# EAGLE board Unicorn_Garbage_Holder_Controller (EAGLE 9.5.0)
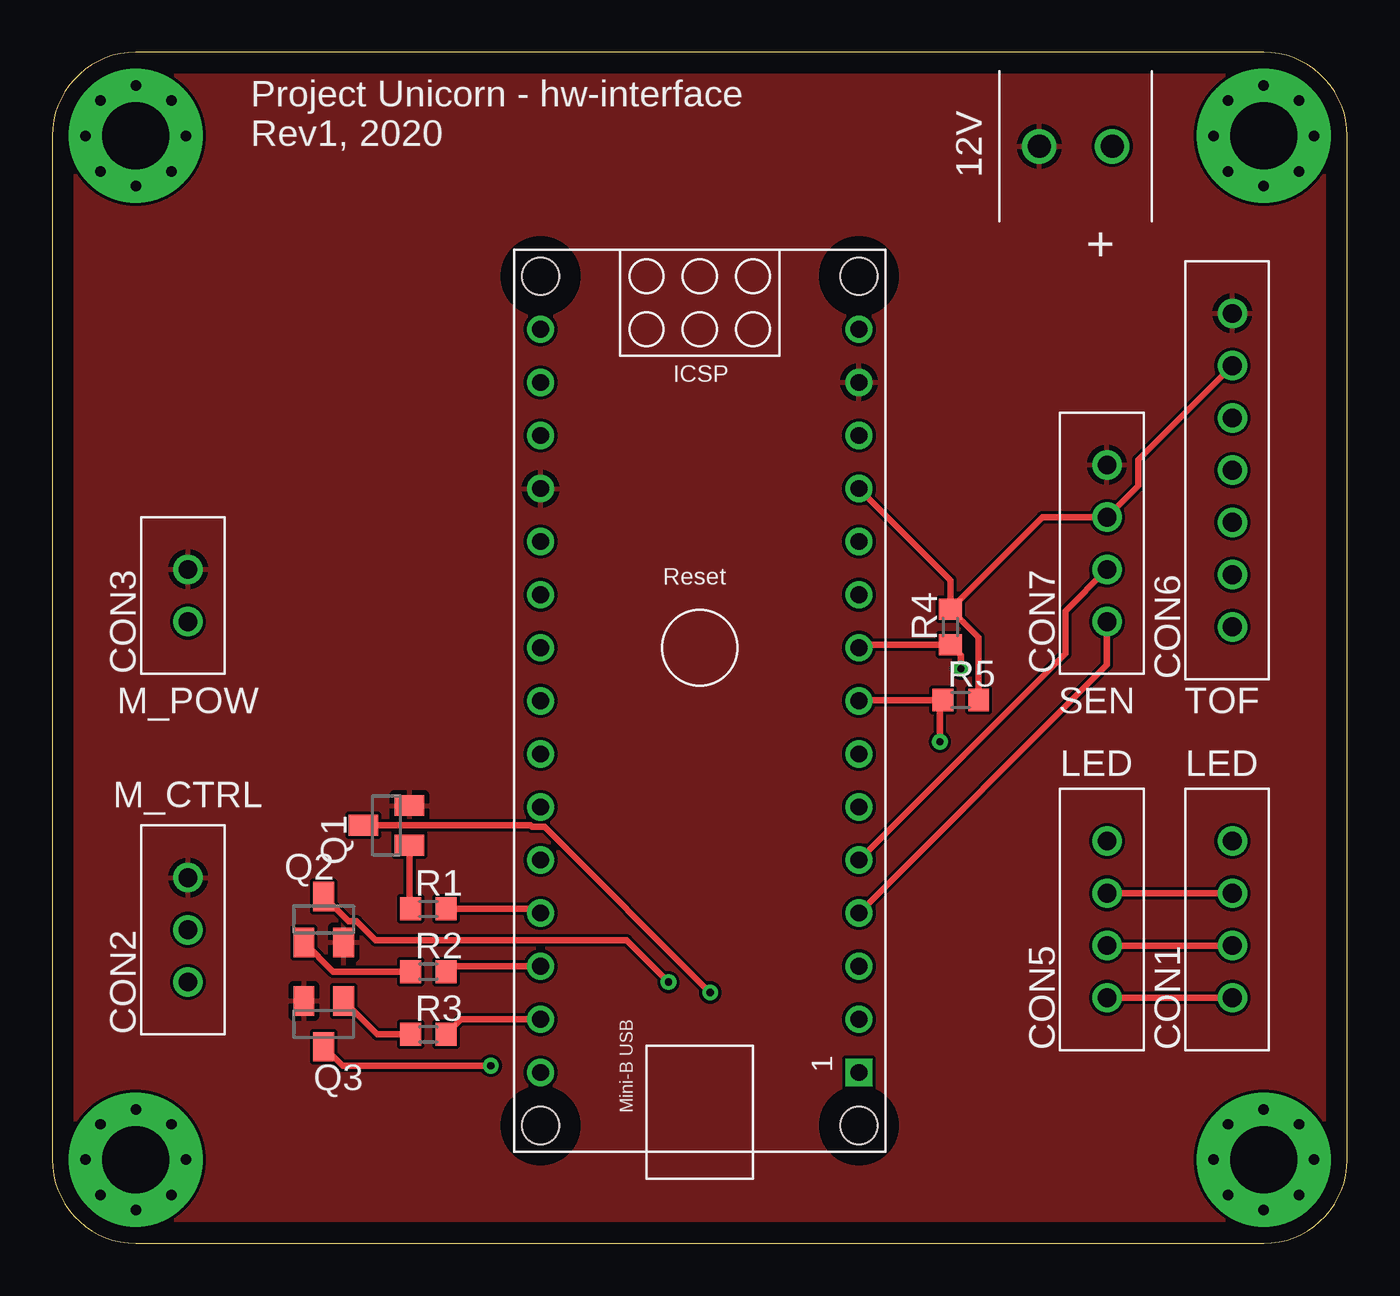
[diagram p0: board, top side]
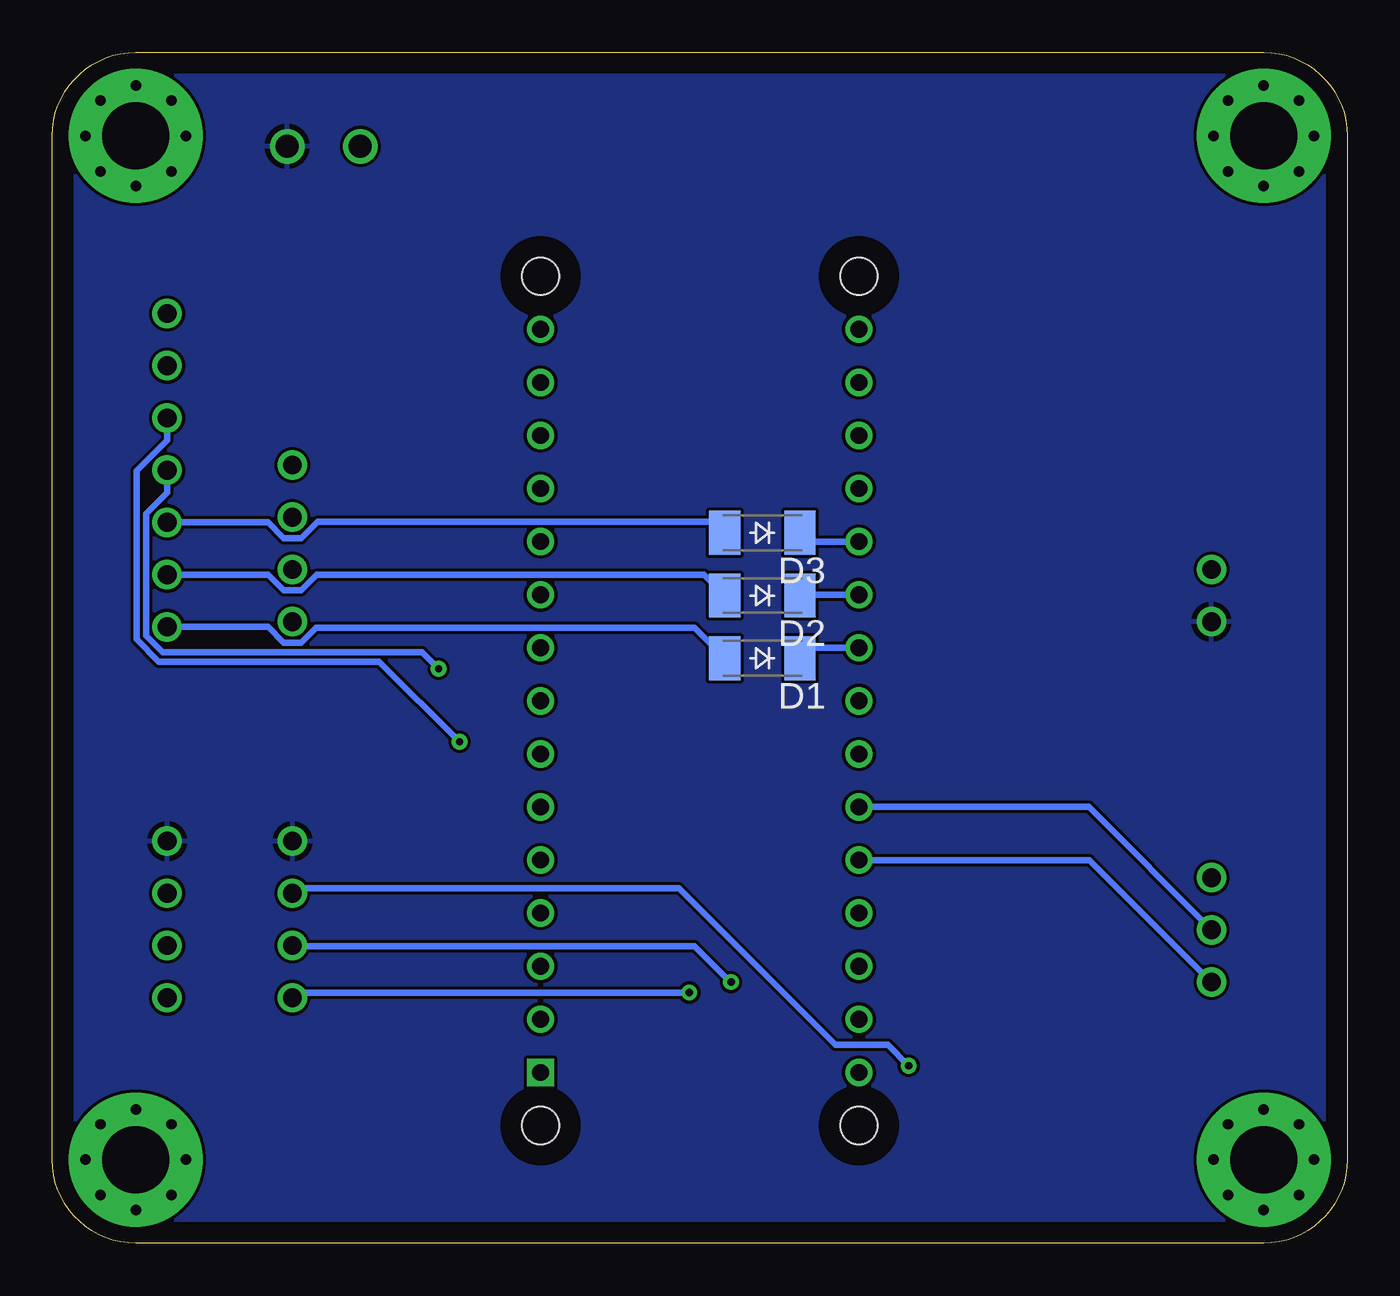
[diagram p1: board, bottom side, seen from below]

Size 62 x 57 mm. Coordinates in mm from the lower left corner, seen from the top.
Outline: 58,0 arc90 62,4 62,53 arc90 58,57 4,57 arc90 0,53 0,4 arc90 4,0 58,0
Copper layers (1*16): Top 0.035mm / dielectric 1.5mm / Bottom 0.035mm
Design rules "default": minimum track width 6mil, minimum drill 0.35mm, track to track 6mil, track to pad 6mil, pad to pad 6mil, via to via 6mil, smd to smd 6mil, copper to edge 40mil, drill to drill 6mil, minimum pad ring 10mil, minimum via ring 8mil, stop-mask expansion 4mil, vias tented up to drill 0mil, thermal gap 10mil

## Footprints (pad centres in the part's own frame; a part is rotated, then mirrored left to right if it is on the bottom)
ARDUINO_NANO = drill 0.8 square: 1 -20.32,-7.62 | drill 0.8: 2 -17.78,-7.62; 3 -15.24,-7.62; 4 -12.7,-7.62; 5 -10.16,-7.62; 6 -7.62,-7.62; 7 -5.08,-7.62; 8 -2.54,-7.62; 9 0,-7.62; 10 2.54,-7.62; 11 5.08,-7.62; 12 7.62,-7.62; 13 10.16,-7.62; 14 12.7,-7.62; 15 15.24,-7.62; 16 15.24,7.62; 17 12.7,7.62; 18 10.16,7.62; 19 7.62,7.62; 20 5.08,7.62; 21 2.54,7.62; 22 0,7.62; 23 -2.54,7.62; 24 -5.08,7.62; 25 -7.62,7.62; 26 -10.16,7.62; 27 -12.7,7.62; 28 -15.24,7.62; 29 -17.78,7.62; 30 -20.32,7.62 | hole 1.778: -22.86,-7.62; -22.86,7.62; 17.78,7.62; 17.78,-7.62
B4B-EH = drill 0.9: 1 -3.75,0; 2 -1.25,0; 3 1.25,0; 4 3.75,0
B3B-EH = drill 0.9: 1 -2.5,0; 2 0,0; 3 2.5,0
B2B-EH = drill 0.9: 1 -1.25,0; 2 1.25,0
B7B-EH = drill 0.9: 1 -7.5,0; 2 -5,0; 3 -2.5,0; 4 0,0; 5 2.5,0; 6 5,0; 7 7.5,0
SOD-123_MINI-SMA = smd 1.5 x 2.1: A 1.8,0; C -1.8,0
1751248 = drill 1.1: 1 -1.75,0; 2 1.75,0
SOT23 = smd 1 x 1.4: 1 -0.95,-1.1; 2 0.95,-1.1; 3 0,1.1
R0603 = smd 1 x 1.1: 1 -0.85,0; 2 0.85,0
M3_MOUNTING_HOLE = drill 0.5 pad 0.8: P$1 -2.4,0; P$2 0,2.4; P$3 2.4,0; P$4 0,-2.4; P$5 -1.697,1.697; P$6 1.697,1.697; P$7 1.697,-1.697; P$8 -1.697,-1.697 | drill 3.2 pad 6.4: P$10 0,0

## Placement (x,y rotation side)
ARDUINO_NANO1  [ARDUINO_NANO]  31,28.5 90 top
CON1  EH_B4B-EH  [B4B-EH]  56.5,15.5 90 top
CON2  EH_B3B-EH  [B3B-EH]  6.5,15 90 top
CON3  EH_B2B-EH  [B2B-EH]  6.5,31 90 top
CON5  EH_B4B-EH  [B4B-EH]  50.5,15.5 90 top
CON6  EH_B7B-EH  [B7B-EH]  56.5,37 90 top
CON7  EH_B4B-EH  [B4B-EH]  50.5,33.5 90 top
D1  CGRM4001-G  [SOD-123_MINI-SMA]  28,28 180 bottom
D2  CGRM4001-G  [SOD-123_MINI-SMA]  28,31 180 bottom
D3  CGRM4001-G  [SOD-123_MINI-SMA]  28,34 180 bottom
J1  [1751248]  49,52.5 180 top
Q1  BC817  [SOT23]  16,20 90 top
Q2  BC817  [SOT23]  13,15.5 0 top
Q3  BC817  [SOT23]  13,10.5 180 top
R1  1K  [R0603]  18,16 0 top
R2  1K  [R0603]  18,13 0 top
R3  1K  [R0603]  18,10 0 top
R4  2.2K  [R0603]  43,29.5 90 top
R5  2.2K  [R0603]  43.5,26 0 top
U$5  M3_MOUNTING_HOLE  [M3_MOUNTING_HOLE]  4,53 0 top
U$6  M3_MOUNTING_HOLE  [M3_MOUNTING_HOLE]  4,4 0 top
U$7  M3_MOUNTING_HOLE  [M3_MOUNTING_HOLE]  58,4 0 top
U$8  M3_MOUNTING_HOLE  [M3_MOUNTING_HOLE]  58,53 0 top

## Library data of the parts
ARDUINO_NANO1 J1 = Unicorn
CON1-CON3 CON5-CON7 = CASE-JST
D1-D3 = diode
Q1-Q3 = CASE-Transistors
R1-R5 = CASE-RCL
U$5-U$8 = Programming_interface_lib

## Nets
+5V: ARDUINO_NANO1.12 CON6.6 CON7.3 R4.2 R5.2
+12V: CON1.4 CON3.1 CON5.4 J1.1
GND: ARDUINO_NANO1.14 ARDUINO_NANO1.19 CON2.3 CON3.2 CON6.7 CON7.4 J1.2 Q1.2 Q2.2 Q3.2
LED_B: ARDUINO_NANO1.29 R3.2
LED_G: ARDUINO_NANO1.28 R2.2
LED_R: ARDUINO_NANO1.27 R1.2
MOTOR_1: ARDUINO_NANO1.26 CON2.1
MOTOR_2: ARDUINO_NANO1.25 CON2.2
N$1: Q1.1 R1.1
N$4: Q2.1 R2.1
N$5: Q3.1 R3.1
N$6: CON1.1 CON5.1 Q1.3
N$7: CON1.2 CON5.2 Q2.3
N$8: CON1.3 CON5.3 Q3.3
N$14: ARDUINO_NANO1.22 D1.C
N$15: ARDUINO_NANO1.21 D2.C
N$16: ARDUINO_NANO1.20 D3.C
TOF_EN_FRONT: CON6.2 D2.A
TOF_EN_LEFT: CON6.1 D1.A
TOF_EN_RIGHT: CON6.3 D3.A
TOF_SCL: ARDUINO_NANO1.9 CON6.4 R4.1
TOF_SDA: ARDUINO_NANO1.8 CON6.5 R5.1
TRASH_1: ARDUINO_NANO1.4 CON7.1
TRASH_2: ARDUINO_NANO1.5 CON7.2
VIN: ARDUINO_NANO1.15

## Tracks (layer width: path | path; a pad name or v marks a point on that pad's centre or on a via)
+5V
  Top 0.3: R4.2 44.35,29 R5.2 | ARDUINO_NANO1.12 43,31.74 R4.2 | R4.2 47.4,34.75 CON7.3 52,36.25 52,37.5 CON6.6
+12V
  pour Bottom: 0,57.5 62.5,57.5 62.5,-0.5 0,-0.5
GND
  pour Top: 0,57.5 62.5,57.5 62.5,-0.5 0,-0.5
LED_B
  Top 0.3: R3.2 19.57,10.72 ARDUINO_NANO1.29
LED_G
  Top 0.3: R2.2 19.11,13.26 ARDUINO_NANO1.28
LED_R
  Top 0.3: R1.2 23.18,16 ARDUINO_NANO1.27
MOTOR_1
  Bottom 0.3: ARDUINO_NANO1.26 12.34,18.34 CON2.1
MOTOR_2
  Bottom 0.3: ARDUINO_NANO1.25 12.38,20.88 CON2.2
N$1
  Top 0.2: 17.1,16.05 R1.1
  Top 0.3: Q1.1 17.1,16.05
N$4
  Top 0.3: Q2.1 13.45,13 R2.1
N$5
  Top 0.3: R3.1 15.55,10 Q3.1
N$6  (via drill 0.35)
  Top 0.3: CON5.1 CON1.1 | Q1.3 22.91,20 22.98,19.92 23.58,19.92 v31.5,12
  Bottom 0.3: v31.5,12 50.25,12 CON5.1
N$7  (via drill 0.35)
  Top 0.3: CON5.2 CON1.2 | Q2.3 14.2,15.4 14.57,15.4 15.48,14.5 27.5,14.5 v29.5,12.5
  Bottom 0.3: v29.5,12.5 29.54,12.5 31.25,14.22 50.47,14.22 CON5.2
N$8  (via drill 0.35)
  Top 0.3: CON5.3 CON1.3 | Q3.3 13.9,8.5 v21,8.5
  Bottom 0.3: v21,8.5 22,9.5 24.5,9.5 32,17 50.25,17 CON5.3
N$14
  Bottom 0.3: ARDUINO_NANO1.22 25.7,28.5 D1.C
N$15
  Bottom 0.3: ARDUINO_NANO1.21 26.16,31.04 D2.C
N$16
  Bottom 0.3: ARDUINO_NANO1.20 25.78,33.58 D3.C
TOF_EN_FRONT
  Bottom 0.3: CON6.2 51.67,32 50.92,31.24 50.08,31.24 49.33,32 30.8,32 D2.A
TOF_EN_LEFT
  Bottom 0.3: CON6.1 51.67,29.5 50.92,28.74 50.08,28.74 49.37,29.46 31.26,29.46 D1.A
TOF_EN_RIGHT
  Bottom 0.3: CON6.3 51.67,34.5 50.92,33.74 50.08,33.74 49.29,34.54 30.34,34.54 D3.A
TOF_SCL  (via drill 0.35)
  Top 0.3: ARDUINO_NANO1.9 38.77,28.65 R4.1 43.5,28.15 v43.5,27.5
  Bottom 0.3: v43.5,27.5 44.29,28.29 56.71,28.29 57.51,29.08 57.51,34.92 56.5,35.92 CON6.4
TOF_SDA  (via drill 0.35)
  Top 0.3: ARDUINO_NANO1.8 38.66,26 R5.1 42.5,25.85 v42.5,24
  Bottom 0.3: v42.5,24 46.34,27.84 56.9,27.84 57.96,28.9 57.96,36.96 56.5,38.42 CON6.5
TRASH_1
  Top 0.3: ARDUINO_NANO1.4 50.5,27.68 CON7.1
TRASH_2
  Top 0.3: ARDUINO_NANO1.5 48.5,28.22 48.5,30.25 CON7.2

## Text on the board
tPlace: Project Unicorn - hw-interface / Rev1, 2020 | 12V | M_POW | SEN | TOF | LED | LED | M_CTRL